# Altium PCB 隔离+IR2184+半桥 V1.0.PcbDoc
Units mm, origin at the board's own origin, x right, y up, seen from the top; angles counter-clockwise.
Board outline 95.6 x 32.64 mm, 2 copper layers (Top Layer, Bottom Layer); 42 components, 20 nets, 160 pads, 37 vias.
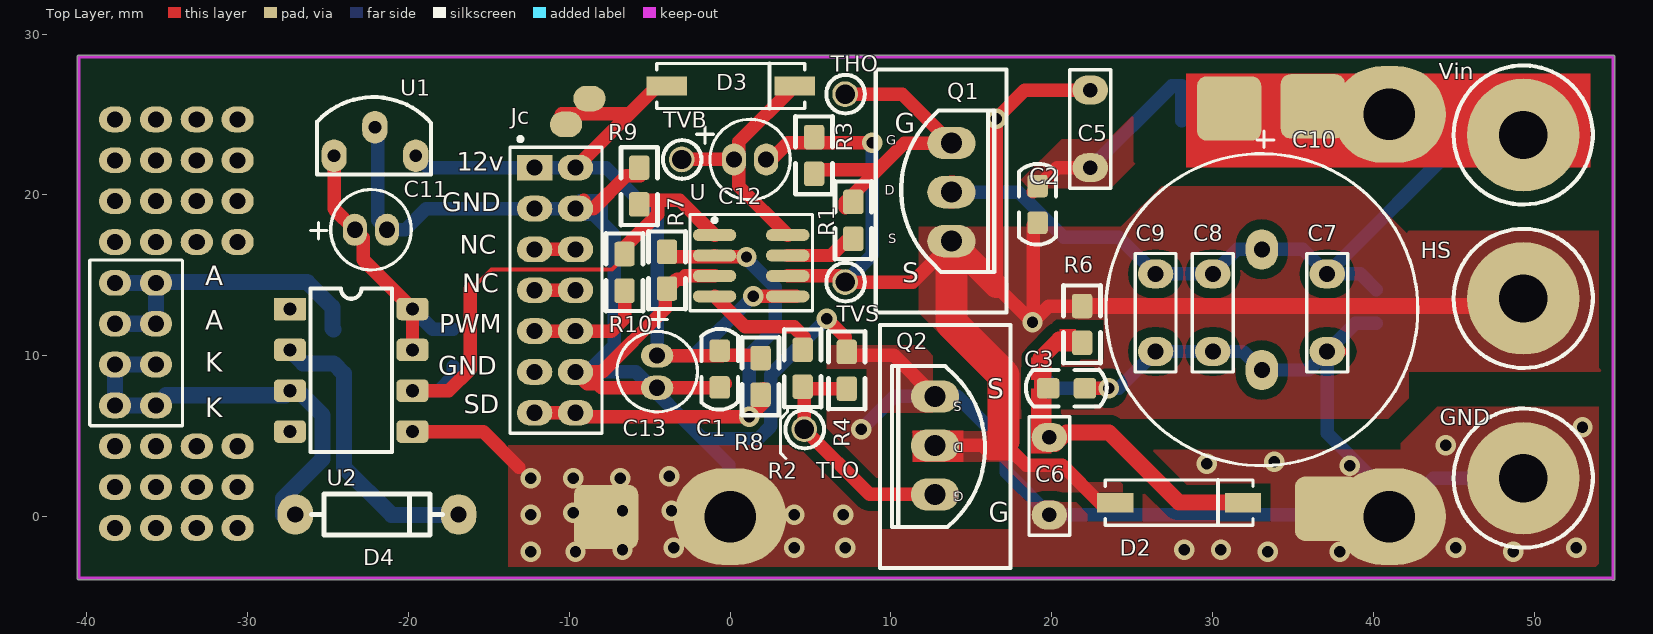
[diagram p0: Top Layer view]
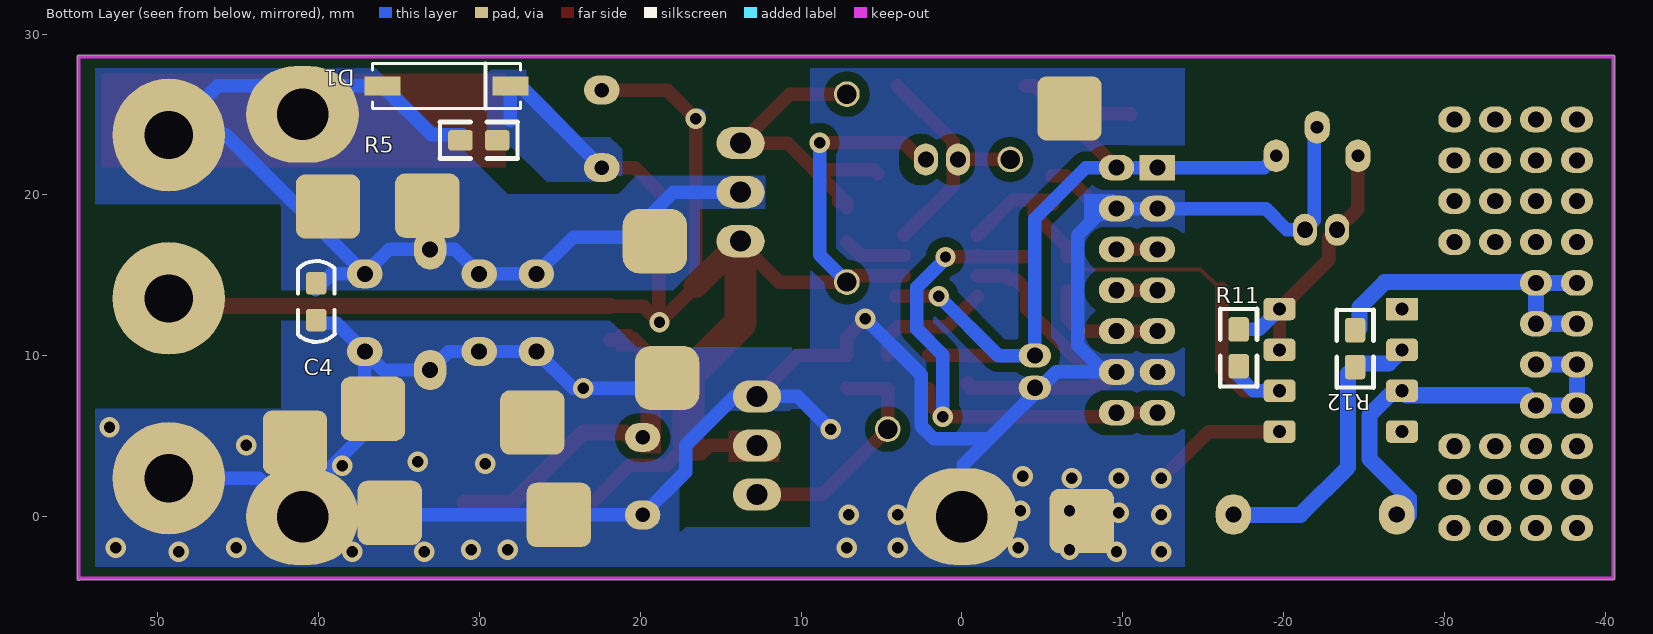
[diagram p1: Bottom Layer view, seen from below]

## Layer stack, top to bottom
Top Solder: solder mask 0.0102, Solder Resist, Dk 3.5
Top Layer: signal copper 0.0356
Dielectric1: dielectric 0.32, FR-4, Dk 4.8
Bottom Layer: signal copper 0.0356
Bottom Solder: solder mask 0.0102, Solder Resist, Dk 3.5

## Board outline
-40.588,-3.835 -40.588,28.581 cw(c-40.488,28.581) -40.479,28.681 cw(c-40.47,28.581) -40.47,28.682 54.907,28.682 cw(c54.907,28.581) 55.008,28.581 55.008,-3.861 cw(c54.907,-3.861) 54.84,-3.936 -40.444,-3.936 cw(c-40.444,-3.835) -40.466,-3.933 cw(c-40.488,-3.835)

## Design rules (kind name [scope] priority, off if disabled: settings)
Clearance [All] p1: gap=0.254
PlaneConnect [All] p1: planeconnectstyle=Relief reliefexpansion=0.8 reliefentries=4 reliefconductorwidth=0.8 reliefairgap=0
PolygonConnect [All] p1: connectstyle=Direct reliefconductorwidth=0.254 reliefentries=4 polygonreliefangle="90 Angle" airgapwidth=0.254
RoutingVias [All] p1: holewidth=0.711 width=1.27 viastyle="Through Hole" minholewidth=0.711 minwidth=1.27 maxholewidth=0.711 maxwidth=1.27
SilkToSolderMaskClearance SilkscreenOverComponentPads [IsPad] p1: minsilkscreentomaskgap=0.254 clearancetoexposedcopper=TRUE
SolderMaskExpansion [All] p1: expansion=0.102
Width [All] p1: maxlimit=38 minlimit=0.084 preferedwidth=0.838
27 further rules are at their usual default settings.

## Components (designator, comment, footprint, x,y, rotation, side; value= is the part's Value field where it differs from the comment)
C1 "C" 0805C -0.643,10.312 r270 top
C2 "C" 0805C 19.119,18.263 r90 top
C3 "C" 0805C 22.065,7.976 r180 top
C4 "C" 0805C 40.15,12.217 r90 bottom
C5 "C" C-4.8MM-D#1 22.395,21.692 r90 top
C6 "C" C-4.8MM-D#1 19.855,4.928 r270 top
C7 "C" C-4.8MM-D#2 37.127,15.088 r270 top
C8 "C" C-4.8MM-D#2 30.015,15.088 r270 top
C9 "C" C-4.8MM-D#2 26.459,15.088 r270 top
C10 "Cap" CAP-7.5MM-19 33.063,16.612 r270 top
C11 "Cap" Cap-2mm-5 -23.325,17.831 r0 top
C12 "Cap" Cap-2mm-5 0.246,22.2 r0 top
C13 "Cap" Cap-2mm-5 -4.529,10.008 r270 top
D1 "FR101" FR10X#1 32.047,26.772 r180 bottom
D2 "FR101" FR10X#1 27.923,0.864 r0 top
D3 "FR101" FR10X#2 0.043,26.772 r0 top
D4 "1N4148" DIODE0.4/AK -27.033,0.127 r0 top
GND "Header1" OUT 49.319,2.388 r0 top (schematic designator V-)
HS "Header1" OUT 49.319,13.564 r0 top
Jc "Connect-1" 接插件1 -12.149,21.692 r0 top
Q1 "NMOS" NMOS+S 13.759,20.168 r0 top
Q2 "NMOS" NMOS+S 12.743,4.42 r180 top
R1 "1K" 0805R 7.663,17.272 r90 top
R2 "1K" 0805R 4.514,10.363 r270 top
R3 "1K" 0805R 5.225,23.597 r270 top
R4 "1K" 0805R 7.257,10.236 r270 top
R5 "1K" 0805R 31.184,23.393 r180 bottom
R6 "1K" 0805R 21.887,13.09 r270 top
R7 "1K" 0805R -3.919,16.459 r270 top
R8 "1K" 0805R 1.897,9.855 r270 top
R9 "1K" 0805R -5.646,19.406 r90 top
R10 "1K" 0805R -6.561,14.038 r90 top
R11 "1K" 0805R -17.203,9.347 r90 bottom
R12 "1K" 0805R -24.442,11.582 r270 bottom
THO "TestPoint" TestPoint 7.155,26.264 r0 top
TLO "TestPoint" TestPoint 4.615,5.436 r0 top
TVB "TestPoint" TestPoint -3.005,22.2 r0 top
TVS "TestPoint" TestPoint 7.155,14.58 r0 top
U "IR2184" SOIC-8 -0.973,17.628 r0 top
U1 "78L05" TO-92-78LXX2 -24.62,22.428 r0 top
U2 "6N137" dip8 -27.363,12.903 r0 top
Vin "Header1" OUT 49.319,23.724 r0 top

## Footprints (in the part's own frame and the unit in brackets; to place one, negate y for a bottom-side part, rotate by r counter-clockwise, add the part's x,y. Pads: shape width x height; smd on the part's side, far side on the other; paste and mask are expansions set on the pad)
0805C [mil]
  rrect30% 55x50 smd: 1(0,0) 2(90,0)
  silkscreen extent -54,-45 144,45
0805R [mil]
  rrect30% 60x50 smd: 1(0,0) 2(90,0)
  silkscreen extent -50,-45 140,45
C-4.8MM-D#1 [mm] "直插瓷片电容"
  oval 1.8x2.2 hole 0.9: 1(0,0) 2(4.826,0)
  silkscreen extent -1.27,-1.27 6.1,1.27
C-4.8MM-D#2 [mm] "直插瓷片电容"
  oval 1.8x2.2 hole 1: 1(0,0) 2(4.826,0)
  silkscreen extent -1.27,-1.27 6.1,1.27
Cap-2mm-5 [mm]
  oval 1.5x2 hole 1: 1(0,0) 2(2,0)
  silkscreen extent -2.77,-2.5 3.5,2.5
CAP-7.5MM-19 [mm] "2200"
  oval 2.5x2 hole 1: 1(0,0) 2(7.5,0)
  silkscreen extent -7.37,-9.7 13.45,9.7
DIODE0.4/AK [mm]
  oval 2.2x2.5 hole 1: A(0,0) K(10.16,0)
  silkscreen extent 1.02,-1.27 9.14,1.27
dip8 [mm]
  rrect10% 2x1.4 hole 0.813: 1(0,0)
  rrect40% 2x1.4 hole 0.813: 2(0,-2.54) 3(0,-5.08) 4(0,-7.62) 5(7.62,-7.62) 6(7.62,-5.08) 7(7.62,-2.54) 8(7.62,0)
  silkscreen extent 1.27,-8.89 6.35,1.27
FR10X#1 [mm] "Molded Capacitor, 2-Leads, Body 8.7x2.4mm, IPC Medium Density"
  rect 2.25x1.2 smd: 1(-3.975,0) 2(3.975,0)
  silkscreen extent -4.6,-1.4 4.6,1.4, body extent -4.6,-1.35 4.6,1.35, height 1.8
FR10X#2 [mm] "Molded Capacitor, 2-Leads, Body 8.7x2.4mm, IPC Medium Density"
  rect 2.5x1.2 smd: 1(-3.975,0) 2(3.975,0)
  silkscreen extent -4.6,-1.4 4.6,1.4, body extent -4.6,-1.35 4.6,1.35, height 1.8
NMOS+S [mm] "加散热片"
  oval 3x2 hole 1.3: D(0,0) G(0,3.048) S(0,-3.048)
  silkscreen extent -4.7,-7.49 3.43,7.62
OUT [mm]
  round 7 hole 3: 1(0,0)
  silkscreen extent -4.33,-4.32 4.32,4.33
SOIC-8 [mm] "SOP8"
  oval 2.7x0.75 smd: 1(0.011,-0.127) 2(0.011,-1.397) 3(0.011,-2.667) 4(0.011,-3.937) 5(4.561,-3.937) 6(4.561,-2.667) 7(4.561,-1.397) 8(4.561,-0.127)
  silkscreen extent -1.52,-4.83 6.1,1.14, body extent 0.29,-4.53 4.29,0.47, height 1.75
TestPoint [mm]
  round 1.6 hole 1.2: 1(0,0)
  silkscreen extent -1.17,-1.2 1.23,1.2
TO-92-78LXX2 [mil]
  oval 62x80 hole 31.5: G(100,70) I(200,0) O(0,0)
  silkscreen extent -42,-46 238,144
接插件1 [mm]
  rect 2.2x1.6 hole 1: 1(0,0)
  oval 2.2x1.6 hole 1: 1(2.54,0) 2(0,-2.54) 2(2.54,-2.54) 3(0,-5.08) 3(2.54,-5.08) 4(0,-7.62) 4(2.54,-7.62) 5(0,-10.16) 5(2.54,-10.16) 6(0,-12.7) 6(2.54,-12.7) 7(0,-15.24) 7(2.54,-15.24)
  silkscreen extent -1.52,-16.51 4.19,1.9

## Part data
C1 C5 C6 C7 C8 C9: "电容"
C11 C12 C13: "极性电容"
D1 D2: library part Diode
D3: library part Diode, "二极管"
GND HS Vin: "排针"
Jc: "接插件"
Q1 Q2: "NMOS管"
R1 R2 R3 R4 R5 R6 R7 R8 R9 R10 R11 R12: library part R, "电阻"
THO TLO TVB TVS: "测试点"
U: library part IR2184_8F, "MOS同步驱动"
U1: library part 78L0X

## Free pads (board coordinates)
  oval 2x1.6 hole 1: 0(-38.235,-0.711) 0(-38.235,1.829) 0(-38.235,4.369) 0(-38.235,6.909) 0(-38.235,9.449) 0(-38.235,11.989) 0(-38.235,14.529) 0(-38.235,17.069) 0(-38.235,19.609) 0(-38.235,22.149) 0(-38.235,24.689) 0(-35.695,-0.711) 0(-35.695,1.829) 0(-35.695,4.369) 0(-35.695,6.909) 0(-35.695,9.449) 0(-35.695,11.989) 0(-35.695,14.529) 0(-35.695,17.069) 0(-35.695,19.609) 0(-35.695,22.149) 0(-35.695,24.689) 0(-33.155,-0.711) 0(-33.155,1.829) 0(-33.155,4.369) 0(-33.155,17.069) 0(-33.155,19.609) 0(-33.155,22.149) 0(-33.155,24.689) 0(-30.615,-0.711) 0(-30.615,1.829) 0(-30.615,4.369) 0(-30.615,17.069) 0(-30.615,19.609) 0(-30.615,22.149) 0(-30.615,24.689)
  oval 2x1.6 smd: 1(-10.193,24.384) 2(-8.745,25.984)
  rrect50% 4x4 smd far side: 2(19.093,17.12) 3(18.331,8.611)
  oval 7x6 hole 3.2: 3(0,0) 3(41,0) 3(41,25)
  rrect30% 4x4 smd: 13(31.031,25.375) 14(36.238,25.502) 15(37.127,0.483) 16(-7.704,-0.025)
  rrect30% 4x4 smd far side: 18(39.413,19.279) 19(36.619,6.706) 20(25.062,0.102) 20(26.713,5.842) 20(33.241,19.329) 20(35.578,0.229) 20(41.471,4.597) 21(-7.45,-0.279) 22(-6.688,25.375)

## Via types
v1: diameter 1.27, hole 0.711, Top Layer to Bottom Layer, 37 vias

## Nets (pads, with @x,y where several pads share a name; then routed paths per layer and width w, separated by ;. In a path a pad name is that pad's centre, name@x,y a point inside that pad or via, vN(x,y) a via of type N, cw(c..) or ccw(c..) an arc to the next point about the centre after c; other vN are vias at no path point)
+5V: C11.1 R11.2 U1.O U2.7 U2.8 | length 17.2
  Top Layer w0.838: U1.O -24.62,19.126 C11.1 -22.817,17.323 -22.817,15.977 U2.8 U2.7
  Bottom Layer w0.838: U2.8 -18.473,11.633 R11.2
+12: C1.1 C13.1 D3.1 Jc.1 pad.1 pad.2@-8.745,25.984 R8.1 U1.I U.5 | length 53.9
  Top Layer w0.838: pad.1@-10.498,24.994 -10.46,25.032 -6.269,25.032 ; Jc.1@-9.609,21.692 -6.269,25.032 ; C13.1 -0.499,10.008 -0.465,10.042 R8.1@2.075,10.042 ; D3.1 -4.529,26.772 -6.269,25.032 ; v1(1.44,13.691) U.5 U.5@4.107,13.691
  Bottom Layer w0.838: U1.I -18.804,21.692 -12.149,21.692 -9.609,21.692 -7.704,21.692 -4.529,18.517 C13.1 -2.243,10.008 v1(1.44,13.691)
A: pad.0@-35.695,11.989 pad.0@-35.695,14.529 pad.0@-38.235,11.989 pad.0@-38.235,14.529 R12.1 | length 20.8
  Bottom Layer w1: pad.0@-38.235,11.989 -35.695,11.989 pad.0@-35.695,14.529 ; pad.0@-38.184,14.58 -38.235,14.529 pad.0@-35.695,14.529 ; R12.1@-24.646,11.616 -24.722,11.693 -24.722,13.013 -26.288,14.58 -35.644,14.58 pad.0@-35.695,14.529
GND: C1.2 C3.1 C4.1 C6.2 C7.2 C8.2 C9.2 C10.2 C11.2 C13.2 GND.1 Jc.2 Jc.6 pad.3@0,0 pad.3@18.331,8.611 pad.3@41,0 pad.15 pad.16 pad.19 pad.20@25.062,0.102 pad.20@26.713,5.842 pad.20@35.578,0.229 pad.20@41.471,4.597 pad.21 pad.22 Q2.S R4.1 R7.2 R9.2 U1.G U2.5 U.3 | length 187.5
  Top Layer w0.838: U2.5 -15.349,5.283 -13.139,3.073 ; Jc.2@-9.101,19.66 -9.609,19.152 -8.491,19.152 -6.454,21.189 R9.2@-5.593,21.189 ; U.3 -2.774,14.961 -2.971,14.764 -3.295,14.764 -4.021,14.038 -4.021,12.929 -7.958,8.992 -9.609,8.992 -8.888,8.271 -8.255,8.271 -8.214,8.23 -8.212,8.23 -7.99,8.008 C13.2 C1.2@-0.531,8.008 ; C1.2@-0.353,8.321 C1.2@-0.287,8.255 ; v1(6.012,12.294) 7.155,11.151 7.155,10.042 10.169,10.042 Q2.S ; C6.2@19.601,-0.152 C6.2 ; C3.1 v1(23.538,7.976) ; C7.2 C7.2@37.923,10.262
  Bottom Layer w0.838: U1.G -21.902,24.028 -21.902,18.408 C11.2 -20.201,17.831 -18.88,19.152 -12.149,19.152 -9.609,19.152 Jc.2@-8.847,19.152 ; Jc.2@-8.593,19.152 Jc.2@-8.847,19.152 ; pad.3@-0.084,0.991 -0.084,3.228 -1.694,4.839 ; v1(6.012,12.294) 2.545,8.826 2.545,5.635 1.749,4.839 -1.694,4.839 ; v1(8.171,5.436) 10.203,7.468 Q2.S 14.14,7.468 17.188,4.42 17.188,2.769 C6.2 35.603,0.102 36.111,0.61 pad.3@41.699,0.61 ; pad.3@19.855,8.357 20.236,7.976 v1(23.538,7.976) 24.173,7.976 C9.2 C8.2 31.913,10.262 C10.2 35.977,9.112 C7.2 ; C4.1@40.175,12.006 38.871,12.006 C7.2 ; GND.1 43.731,2.388 pad.3@41.953,0.61 ; Jc.2@-8.847,19.152 -7.196,17.501 -7.196,10.643 -8.847,8.992 -9.609,8.992 -5.847,8.992 -1.694,4.839 ; C7.2 37.127,5.182 pad.3@41.699,0.61 ; pad.3@41.699,0.61 pad.3@41.953,0.61 ; pad.3@41.699,0.61 41.826,0.483 pad.3@41.953,0.61
  other v1: -12.403,-2.184 -9.609,-2.184 33.444,-2.184 37.915,-2.184 48.684,-2.184 -6.688,-2.057 28.237,-2.057 30.523,-2.057 -3.513,-1.93 3.98,-1.93 7.155,-1.93 45.128,-1.93 52.621,-1.93 -12.403,0.102 3.98,0.102 7.028,0.102 -9.736,0.229 -6.688,0.356 -3.64,0.356 -12.403,2.388 -9.736,2.388 -6.815,2.388 -3.767,2.515 38.524,3.15 29.634,3.277 33.825,3.404 44.493,4.42 53.002,5.563
HS: C2.1 C5.2 C12.2 D2.1 HS.1 Q1.S Q2.D R3.1 R6.1 TVS.1 U.6 | length 115.4
  Top Layer w0.838: C12.2@2.551,22.2 3.601,23.25 7.155,23.25 v1(8.84,23.25) ; U.6 6.774,14.961 TVS.1 11.361,14.58 Q1.S@13.759,16.978 ; Q2.D 15.712,4.42 16.22,3.912 ; 17.009,4.701 16.22,3.912 ; C2.1@18.839,18.102 v1@18.839,12.108 ; R6.1 19.821,13.09 v1@18.839,12.108 ; C5.2 18.331,26.518 v1(16.553,24.74) 16.553,14.326 v1(18.805,12.074) v1@18.839,12.108 ; D2.1@22.992,0.864 20.668,3.188 18.412,3.188 17.688,3.912 16.22,3.912
  Top Layer w1: R6.1 21.889,13.088 48.843,13.088 HS.1
  Top Layer w1.5: Q1.S 16.553,14.326
  Top Layer w2: Q1.S@13.759,16.978 13.759,12.04 17.009,8.79 17.009,4.701
  Bottom Layer w0.838: TVS.1 8.84,16.265 v1(8.84,23.25) ; v1@16.353,24.94 v1(16.553,24.74)
K: D4.A pad.0@-35.695,6.909 pad.0@-35.695,9.449 pad.0@-38.235,6.909 pad.0@-38.235,9.449 U2.3 | length 26.2
  Bottom Layer w1: pad.0@-35.695,9.449 -38.235,9.449 -38.235,6.909 -35.695,6.909 -35.06,7.544 -27.643,7.544 U2.3 -26.855,7.823 -25.331,6.299 -25.331,3.581 -27.795,1.118 D4.A@-27.795,0.102
NC: Jc.3 | length 2.5
  Top Layer w0.838: Jc.3@-12.149,16.612 Jc.3@-9.609,16.612
NC2: Jc.4 | length 2.5
  Top Layer w0.838: Jc.4@-12.149,14.072 Jc.4@-9.609,14.072
NetC2_2: C2.2 C5.1 D1.2 R5.2 | length 14.1
  Top Layer w0.838: C2.2@18.839,20.202 20.329,21.692 C5.1
  Bottom Layer w0.838: C5.1 27.475,26.772 D1.2 28.072,24.617
NetC3_2: C3.2 C6.1 D2.2 R6.2 | length 18.5
  Top Layer w0.838: C3.2@19.313,7.976 19.313,9.847 ; C6.1@19.855,4.509 C6.1 ; 20.456,10.99 R6.2@21.887,10.99
  Top Layer w1: 19.313,9.847 20.456,10.99 ; C6.1@19.855,4.509 20.202,4.509 20.91,5.216 23.571,5.216 27.923,0.864 D2.2@30.942,0.864
NetC12_1: C12.1 D3.2 TVB.1 U.8 | length 15.5
  Top Layer w0.838: TVB.1 C12.1@0.551,22.2 ; U.8 0.551,20.538 C12.1@0.551,22.2 ; D3.2 0.551,23.305 C12.1@0.551,22.2
NetD4_K: D4.K R12.2 U2.2 | length 17.4
  Bottom Layer w1: U2.2 -27.363,10.338 -26.542,9.516 -24.646,9.516 -24.011,8.881 -24.011,3.073 -21.039,0.102 D4.K@-17.635,0.102
NetQ1_G: Q1.G R1.2 R3.2 THO.1 | length 20.2
  Top Layer w0.838: R3.2 5.479,21.565 9.187,21.565 ; R1.2@7.155,19.186 R1.2@7.155,19.558 ; THO.1 10.711,26.264 Q1.G 10.838,23.216 9.187,21.565 ; R1.2 7.663,20.041 9.187,21.565
NetQ2_G: Q2.G R2.2 R4.2 TLO.1 | length 14.9
  Top Layer w0.838: R4.2@7.155,8.01 7.087,7.942 4.615,7.942 TLO.1 8.679,1.372 Q2.G
NetR1_1: R1.1 U.7 | length 3.9
  Top Layer w0.838: U.7 6.3,16.231 R1.1@7.155,17.086
NetR2_1: R2.1 U.4 | length 7.7
  Top Layer w0.838: U.4 0.943,11.786 3.98,11.786 4.615,11.151 R2.1@4.615,10.042
NetR9_1: R9.1 R10.2 R11.1 U2.6 U.1 | length 33.2
  Top Layer w0.254: -16.162,14.173 -16.035,14.173 -14.841,15.367 -7.331,15.367 R10.2@-6.561,16.138
  Top Layer w0.838: U2.6 -17.483,7.823 -16.162,9.144 -16.162,14.173 ; R10.2@-6.561,16.138 -6.561,16.739 -4.495,18.805 -4.495,19.66 ; R9.1 -5.392,19.66 -4.495,19.66 ; U.1 -3.121,19.66 -4.495,19.66
  Bottom Layer w0.838: U2.6 -18.118,7.823 -17.203,8.738 R11.1
PWM: Jc.5 R10.1 | length 7.6
  Top Layer w0.838: Jc.5@-12.149,11.532 -9.609,11.532 -7.374,11.532 -6.561,12.344 R10.1
SD: Jc.7 R7.1 R8.2 U.2 | length 32.1
  Top Layer w0.838: Jc.7@-12.149,6.452 -9.609,6.452 -9.355,6.198 v1(1.186,6.198) 2.075,7.087 R8.2@2.075,7.942 ; R7.1@-4.021,16.138 U.2@-1.055,16.138 ; U.2 U.2@-1.055,16.138 ; v1(1.025,16.138) U.2@-1.055,16.138
  Bottom Layer w0.838: v1(1.025,16.138) 1.025,16.027 2.799,14.253 2.799,11.659 1.186,10.046 v1(1.186,6.198)
VIN: C4.2 C7.1 C8.1 C9.1 C10.1 D1.1 pad.2@19.093,17.12 pad.3@41,25 pad.13 pad.14 pad.18 pad.20@33.241,19.329 Q1.D R5.1 Vin.1 | length 68.6
  Top Layer w0.381: Q1.D@14.567,20.168 Q1.D Q1.D@14.775,20.168
  Top Layer w2: Q1.D Q1.D@13.807,20.216
  Bottom Layer w0.838: Q1.D 17.95,20.168 20.744,17.374 24.173,17.374 C9.1 C8.1 31.539,16.612 C10.1 35.603,16.612 C7.1 ; R5.1@31.065,23.724 32.974,23.724 D1.1 46.271,26.772 Vin.1 45.763,23.724 C7.1 ; C4.2@40.175,14.106 39.193,15.088 C7.1
pads on no net: U2.1 U2.4

## Polygon pours and split planes (outlines as drawn)
NetC2_2 on Bottom Layer "Top Solder-No Net" (solid, remove dead copper, pour order 8): 22.395,20.803 21.125,20.803 21.125,22.835 21.252,22.962 21.887,23.597 23.665,23.597 27.094,27.026 27.094,27.788 29.253,27.788 29.507,27.534 29.507,22.962 27.983,22.962 25.951,20.93 25.824,20.803 21.76,20.803
VIN on Bottom Layer "Top Solder-No Net" (solid, remove dead copper, pour order 6): 12.235,19.152 16.299,19.152 16.299,15.723 17.823,14.199 17.95,14.072 42.334,14.072 42.334,19.279 42.461,19.406 53.891,19.406 53.891,28.296 38.143,28.296 36.873,28.296 34.714,26.137 32.809,24.232 32.682,24.232 32.428,24.232 31.412,23.216 28.237,20.041 18.458,20.041 21.379,20.041 20.236,21.184 12.235,21.184 12.235,19.152
GND on Bottom Layer "Top Solder-No Net" (solid, remove dead copper, pour order 4): 10.584,10.516 20.236,10.516 21.633,11.913 21.887,12.167 42.334,12.167 42.334,6.706 53.891,6.706 53.891,-3.581 17.569,-3.581 17.569,4.039 17.188,4.42 15.029,6.579 14.267,6.579 10.711,6.579 10.584,6.706 10.584,10.516
GND on Bottom Layer "Top Solder-No Net" (solid, remove dead copper, pour order 2): -14.308,28.423 9.314,28.423 9.441,28.296 9.441,10.389 10.457,10.389 10.584,10.516 10.584,6.706 9.314,6.706 9.441,6.579 9.441,-0.66 17.188,-0.66 17.569,-1.041 17.569,-3.327 -14.181,-3.327 -14.308,-3.454 -14.308,28.423
HS on Top Layer "Top Solder-No Net" (solid, remove dead copper, pour order 16): 12.616,18.009 16.172,18.009 24.3,18.009 24.427,18.136 26.84,20.549 28.491,20.549 39.159,20.549 42.08,17.628 42.207,17.755 54.018,17.755 54.018,9.246 54.272,8.992 42.207,8.992 42.207,7.341 40.937,6.071 17.696,6.071 16.172,6.071 16.172,8.484 15.918,8.484 12.87,11.532 11.727,12.675 11.727,18.009 12.616,18.009
HS on Top Layer "Top Solder-No Net" (solid, remove dead copper, pour order 14): 11.473,5.309 16.045,5.309 16.172,5.436 18.42,3.188 18.712,3.188 20.325,3.188 20.617,2.896 21.379,2.134 22.395,2.134 24.3,2.134 24.427,2.007 24.427,1.499 18.712,1.499 18.077,2.134 16.807,3.404 16.299,3.404 13.124,3.404 11.092,5.436
GND on Top Layer "Top Solder-No Net" (solid, remove dead copper, pour order 12): -13.8,4.42 5.631,4.42 5.758,4.547 6.012,4.801 6.012,10.643 11.981,10.643 12.362,10.262 12.616,10.008 12.616,6.452 9.441,6.452 9.314,6.325 9.441,6.198 9.441,-0.787 17.315,-0.787 17.442,-0.914 17.442,4.801 24.3,4.801 24.681,4.42 24.935,4.166 41.699,4.166 41.699,4.547 43.731,6.579 43.985,6.833 54.018,6.833 54.018,-2.946 53.891,-3.073 53.764,-3.2 -13.8,-3.2 -13.8,4.42
NetC2_2 on Top Layer "Top Solder-No Net" (solid, remove dead copper, pour order 10): 21.887,23.47 20.617,23.47 18.077,20.93 18.585,20.422 19.728,20.422 23.665,20.422 25.189,21.946 25.062,22.073 25.062,24.867 24.935,24.867 23.665,23.597 23.538,23.47 21.379,23.47

## Keep-outs
Keep-Out Layer:
  lines w0.2: -40.488,-3.835 -40.488,28.581 ; -40.47,28.581 49.795,28.581 54.907,28.581 54.907,-3.861 ; -40.444,-3.835 5.472,-3.835 40.207,-3.835 54.907,-3.835

## Other copper
Top Layer:
  rectangle net NetC3_2: 20.49,10.262 21.506,11.659
  rectangle net NetC3_2: 18.712,8.484 19.982,9.881
  rectangle net NetC3_2: 18.712,3.912 19.728,7.976
  rectangle net NetC3_2: 19.22,3.912 19.982,7.341
  rectangle net HS: 11.354,3.404 14.521,5.348
  rectangle net VIN: 28.364,21.692 53.51,27.534
Bottom Layer:
  rectangle net GND: -9.482,18.39 -7.577,20.041

## Silkscreen, mask and mechanical layers (free items; w line width, h text height)
Top Overlay:
  lines w0.2: 3.472,3.607 3.142,3.937 3.142,6.071 3.574,6.502 3.574,6.655 ; -39.809,5.69 -39.759,5.639 -34.044,5.639 -34.044,15.9 -34.094,15.951 -39.784,15.951 -39.809,15.926 -39.809,5.69
  text "G" at 10.229,23.851 h1.2
  text "12v" at -17.001,21.103 h2
  text "GND" at -17.89,18.563 h2
  text "NC" at -16.802,15.927 h2
  text "S" at 10.711,14.58 h1.2
  text "A" at -32.621,14.376 h1.2
  text "NC" at -16.645,13.538 h2
  text "A" at -32.621,11.608 h1.2
  text "PWM" at -18.092,11.024 h2
  text "K" at -32.621,8.992 h1.2
  text "GND" at -18.144,8.403 h2
  text "S" at 15.994,7.341 h1.2
  text "K" at -32.621,6.172 h1.2
  text "SD" at -16.548,6.021 h2
  text "G" at 16.096,-0.33 h1.2

## Text inside footprints (layer, text, board x,y; h text height)
Q1: Top Overlay "S" at 9.848,16.789 h1; Top Overlay "D" at 9.619,19.787 h1; Top Overlay "G" at 9.721,22.885 h1
Q2: Top Overlay "S" at 14.394,7.341 h1 r180; Top Overlay "D" at 14.521,4.801 h1 r180; Top Overlay "G" at 14.521,1.753 h1 r180